# Altium PCB Arduino幻彩灯带.PcbDoc
Units mm, origin at the board's own origin, x right, y up, seen from the top; angles counter-clockwise.
Board outline 68.83 x 53.59 mm, 2 copper layers (Top Layer, Bottom Layer); 35 components, 33 nets, 139 pads, 99 vias.
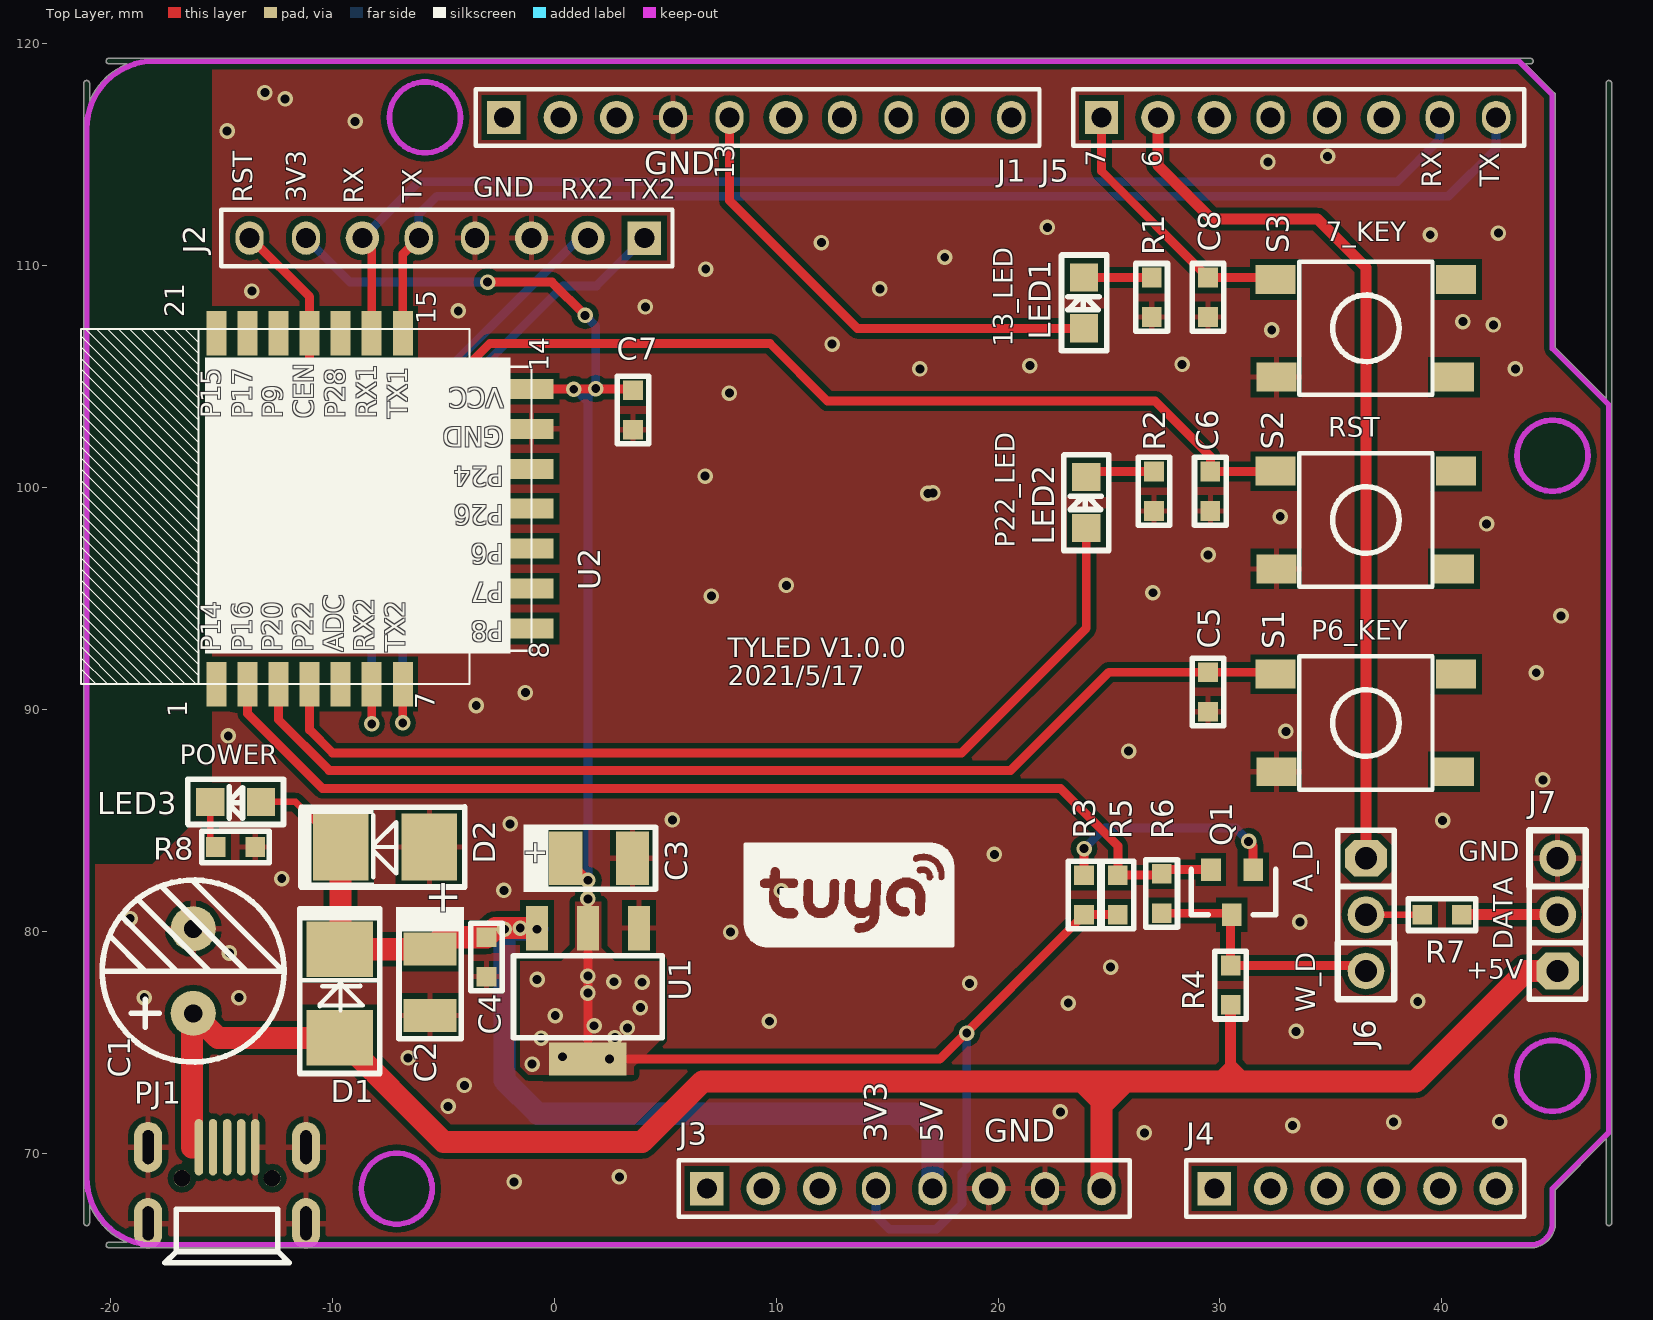
[diagram p0: Top Layer view]
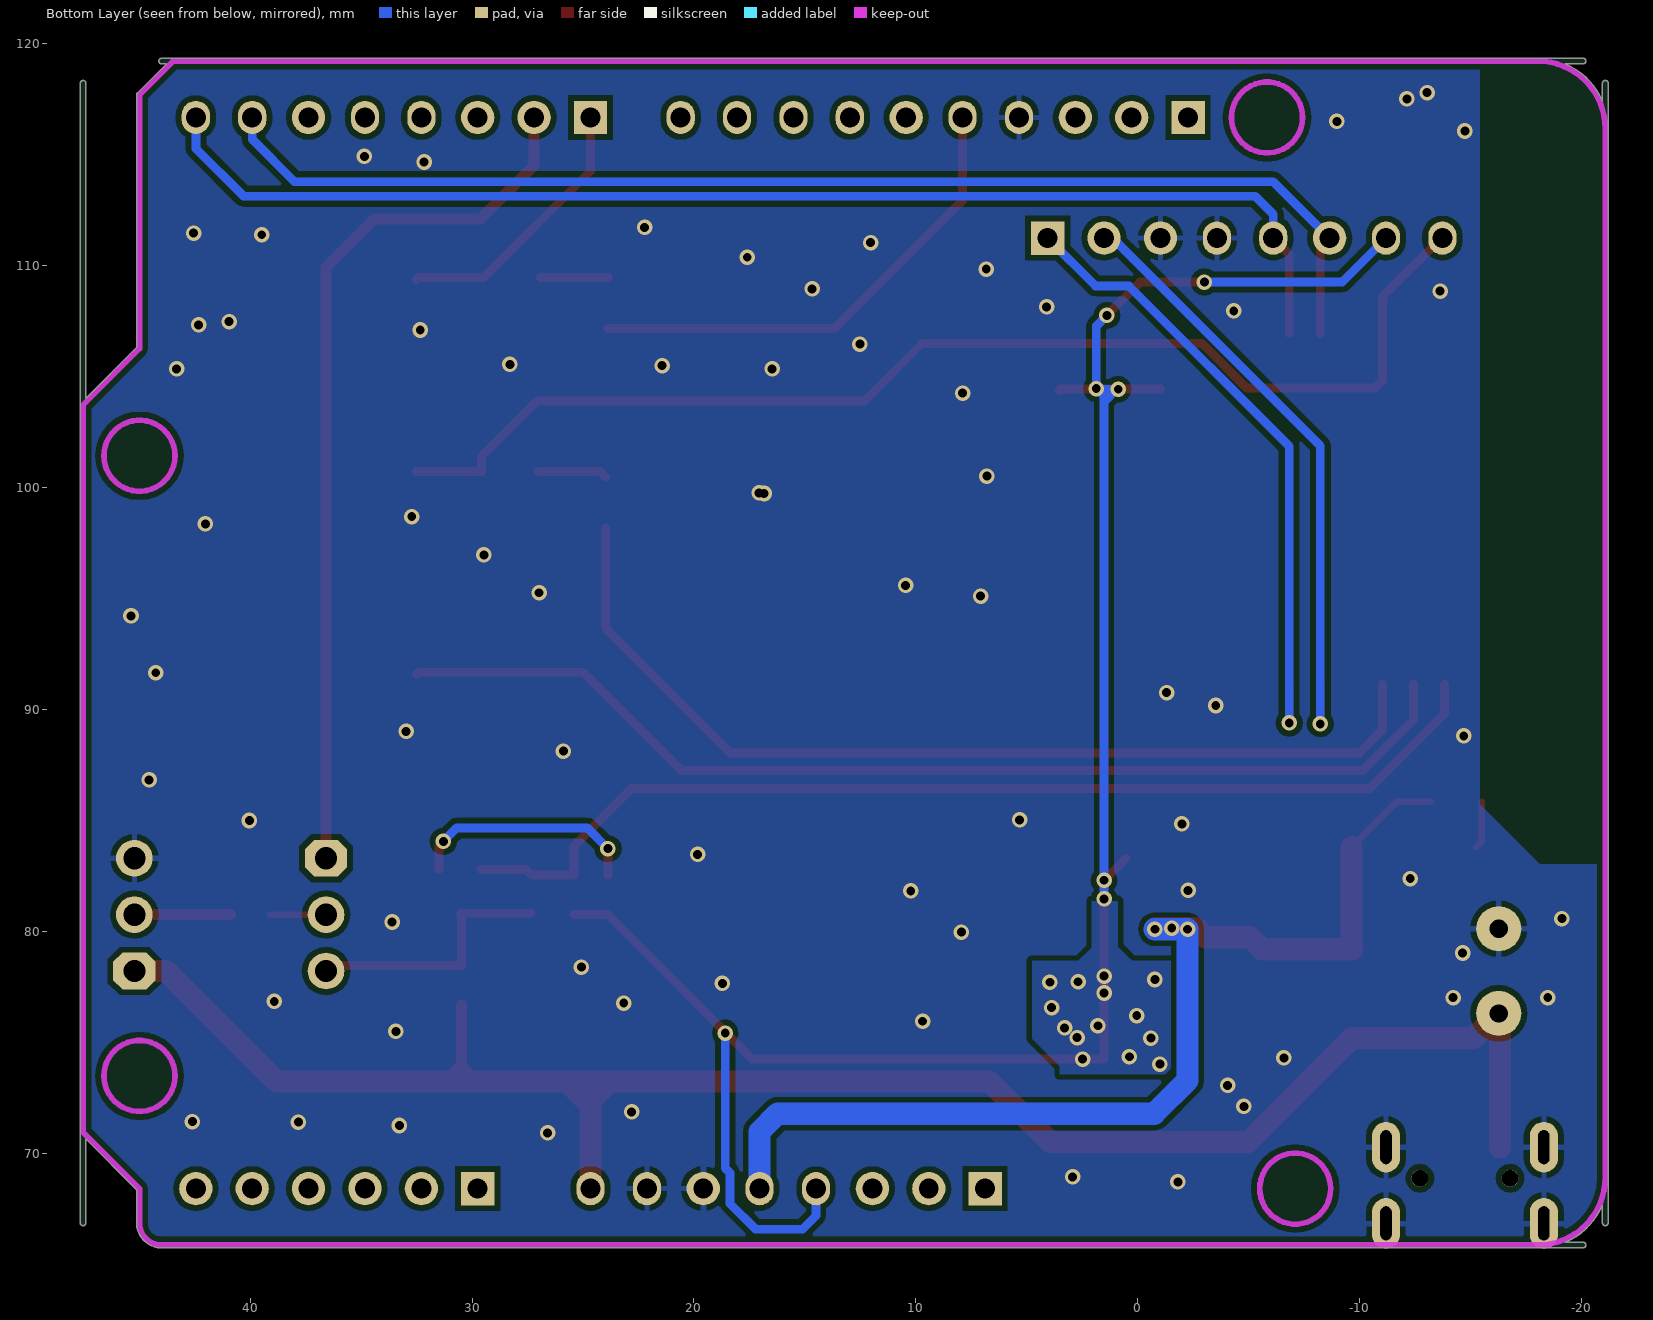
[diagram p1: Bottom Layer view, seen from below]

## Layer stack, top to bottom
Top Layer: signal copper 0.0356
Dielectric: dielectric 0.32, FR-4, Dk 4.8
Bottom Layer: signal copper 0.0356

## Board outline
-21.184,66.888 ccw(c-21.057,66.888) -20.929,66.888 -20.929,67.689 ccw(c-18.009,68.936) -19.255,66.015 -20.057,66.015 ccw(c-20.057,65.888) -20.057,65.76 43.983,65.76 ccw(c43.983,66.888) 45.111,66.888 ccw(c44.983,66.888) 45.111,66.888 45.111,68.375 47.396,70.66 47.396,66.888 ccw(c47.523,66.888) 47.651,66.888 47.651,118.228 ccw(c47.523,118.228) 47.396,118.228 47.396,104.041 45.111,106.326 45.111,117.704 ccw(c44.983,117.704) 45.073,117.794 43.767,119.1 43.983,119.1 ccw(c43.983,119.228) 44.111,119.228 ccw(c43.983,119.228) 43.983,119.355 -20.057,119.355 ccw(c-20.057,119.228) -20.057,119.1 -19.255,119.1 ccw(c-18.009,116.18) -20.929,117.426 -20.929,118.228 ccw(c-21.057,118.228) -21.184,118.228

## Design rules (kind name [scope] priority, off if disabled: settings)
Clearance Clearance_1 [All] p1: gap=0.254
Clearance [InNet('GND') vs InNetClass('All Nets')] p2: gap=0.254
HoleSize [All] p1: absolutevalues=TRUE maxlimit=3 minlimit=0.025 maxpercent=80.000 minpercent=20.000
HoleToHoleClearance [All] p1: gap=0 allowstackedmicrovias=TRUE
MinimumSolderMaskSliver [All] p1: minsoldermaskwidth=0
PolygonConnect PolygonConnect_5 [InNet('+3.3V') vs IsPad] p1: connectstyle=Direct reliefconductorwidth=0.254 reliefentries=4 polygonreliefangle="90 Angle" airgapwidth=0.254
PolygonConnect PolygonConnect_4 [InNet('+3.3V') vs IsVia] p2: connectstyle=Direct reliefconductorwidth=0.254 reliefentries=4 polygonreliefangle="90 Angle" airgapwidth=0.254
PolygonConnect PolygonConnect_3 [InNet('+5V') vs IsVia] p3: connectstyle=Direct reliefconductorwidth=0.254 reliefentries=4 polygonreliefangle="90 Angle" airgapwidth=0.254
PolygonConnect PolygonConnect_2 [InNet('+5V') vs IsPad] p4: connectstyle=Direct reliefconductorwidth=0.254 reliefentries=4 polygonreliefangle="90 Angle" airgapwidth=0.254
PolygonConnect PolygonConnect_1 [InNet('GND') vs IsVia] p5: connectstyle=Direct reliefconductorwidth=0.254 reliefentries=4 polygonreliefangle="90 Angle" airgapwidth=0.254
PolygonConnect [All] p6: connectstyle=Relief reliefconductorwidth=0.254 reliefentries=4 polygonreliefangle="90 Angle" airgapwidth=0.254
RoutingVias [All] p1: holewidth=0.2 width=1.27 viastyle="Through Hole" minholewidth=0.2 minwidth=0.2 maxholewidth=1.2 maxwidth=1.27
SilkToSilkClearance [All] p1: silktosilkclearance=0
SilkToSolderMaskClearance SilkscreenOverComponentPads [IsPad] p1: minsilkscreentomaskgap=0 clearancetoexposedcopper=TRUE
SolderMaskExpansion [All] p1: expansion=0.102
Width [All] p1: maxlimit=6 minlimit=0.254 preferedwidth=0.254
23 further rules are at their usual default settings.

## Components (designator, comment, footprint, x,y, rotation, side; value= is the part's Value field where it differs from the comment)
C1 "220uF±20%/16V" CD0.15 -16.256,78.232 r90 top
C2 "22uF±20%/16V" 钽电容B3528 -5.588,77.724 r270 top
C3 "22uF±20%/16V" 钽电容B3528 2.032,83.312 r0 top
C4 "0.1uF±20%/50V" C0603 -3.048,79.756 r270 top
C5 "0.1uF±20%/16V" C0603 29.464,89.916 r90 top
C6 "0.1uF±20%/16V" C0603 29.566,100.736 r270 top
C7 "0.1uF±20%/16V" C0603 3.556,102.616 r90 top
C8 "0.1uF±20%/16V" C0603 29.464,107.696 r90 top
D1 "SS210" SMA(DO-214AC) -9.652,77.216 r90 top
D2 "SMBJ05CA" SMB(DO-214AA) -7.62,83.82 r180 top
J1 "CON10" HDR1X10Z -2.261,116.688 r0 top
J2 "CON8" HDR1X8Z 4.064,111.252 r180 top
J3 "CON8" HDR1X8Z 6.883,68.428 r0 top
J4 "CON6" HDR1X6Z 29.743,68.428 r0 top
J5 "CON8" HDR1X8Z 24.663,116.688 r0 top
J6 "KF301-3P" "SIP3 - 2.54" 36.576,83.312 r270 top
J7 "KF301-3P" "SIP3 - 2.54" 45.212,78.232 r90 top
LED1 "LED" LED0805_1 23.876,107.188 r90 top
LED2 "LED" LED0805_1 23.978,98.196 r90 top
LED3 "LED" LED0805_1 -13.208,85.852 r180 top
PJ1 "MCR_USB" MICRO_USB-NEW-16.12.12 -14.732,68.58 r180 top
Q1 "S8050" SOT-23-NPN 31.496,82.804 r180 top
R1 "1K±5%" R0603 26.924,107.696 r90 top
R2 "1K±5%" R0603 27.026,100.736 r270 top
R3 "2K±5%" R0603 23.876,80.772 r90 top
R4 "2K±5%" R0603 30.48,76.708 r90 top
R5 "2K±5%" R0603 25.4,80.772 r90 top
R6 "NC/0R" R0603 27.374,82.614 r270 top
R7 "1R±5%" R0603 39.116,80.772 r0 top
R8 "1R±5%" R0603 -15.24,83.82 r0 top
S1 "KEY_SW2" KEY4-SMD 36.576,89.408 r0 top
S2 "KEY_SW2" KEY4-SMD 36.576,98.552 r0 top
S3 "KEY_SW2" KEY4-SMD 36.576,107.188 r0 top
U1 "GM1117-3.3ST3T" SOT-223 1.524,77.216 r180 top
U2 "WIFI_BLE_CBU" WIFI_BLE_CBU -1.016,99.06 r90 top

## Footprints (in the part's own frame and the unit in brackets; to place one, negate y for a bottom-side part, rotate by r counter-clockwise, add the part's x,y. Pads: shape width x height; smd on the part's side, far side on the other; paste and mask are expansions set on the pad)
C0603 [mil]
  rect 35x35 smd: 1(0,0) 2(70,0)
  silkscreen extent -25,-28 95,28, body extent 4,-16 66,15, height 12
CD0.15 [mil]
  round 80 hole 32: 1(-75,0) 2(75,0)
  silkscreen extent -161,-161 161,161, body extent -156,-150 158,165, height 630
HDR1X6Z [mm] "Connector; Header; 5 Position"
  rect 1.5x1.5 hole 0.9: 1(0,0)
  round 1.5 hole 0.9: 2(2.54,0) 3(5.08,0) 4(7.62,0) 5(10.16,0) 6(12.7,0)
  silkscreen extent -1.27,-1.27 13.97,1.27, body extent -1.27,-1.25 13.97,1.25, height 8.65
HDR1X8Z [mm] "Connector; Header; 8 Position"
  rect 1.5x1.5 hole 0.9: 1(0,0)
  round 1.5 hole 0.9: 2(2.54,0) 3(5.08,0) 6(12.7,0)
  oval 1.27x1.5 hole 0.9: 4(7.62,0) 5(10.16,0) 7(15.24,0) 8(17.78,0)
  silkscreen extent -1.27,-1.27 19.05,1.27, body extent -1.27,-1.25 19.05,1.25, height 8.65
HDR1X10Z [mm] "Connector; Header; 10 Position"
  rect 1.5x1.5 hole 0.9: 1(0,0)
  round 1.5 hole 0.9: 2(2.54,0) 3(5.08,0) 6(12.7,0)
  oval 1.27x1.5 hole 0.9: 4(7.62,0) 5(10.16,0) 7(15.24,0) 8(17.78,0) 9(20.32,0) 10(22.86,0)
  silkscreen extent -1.27,-1.27 24.13,1.27, body extent -1.27,-1.25 24.13,1.25, height 8.65
KEY4-SMD [mm]
  rect 1.8x1.3 smd: 1(-4.035,-2.2) 2(-4.065,2.2) 3(4.065,2.2) 4(3.965,-2.2)
  silkscreen extent -3,-3 3,3
LED0805_1 [mil]
  rect 50x50 smd: 1(0,0) 2(90,0)
  silkscreen extent -40,-40 130,40, body extent 6,-25 84,24, height 30
MICRO_USB-NEW-16.12.12 [mil]
  oval 15x100 smd: 1(-50,-67.5) 2(-25,-67.5) 3(0,-67.5) 4(25,-67.5) 5(50,-67.5)
  oval 50x90 hole 20 slot 60 at 90 deg: 6(-140,-67.5) 7(-140,67.5) 8(140,67.5) 9(140,-67.5)
  round 30 hole 30 unplated: ""(-80,-12.5) ""(80,-12.5)
  silkscreen extent -110,42 110,138, body extent -145,-79 146,158, height 93
R0603 [mil]
  rect 35x35 smd: 1(0,0) 2(70,0)
  silkscreen extent -25,-28 95,28, body extent 2,-16 65,16, height 18
"SIP3 - 2.54" [mil]
  oct 65x75 hole 39.37: 1(0,0)
  round 65 hole 39.37: 2(100,0) 3(200,0)
  silkscreen extent -50,-50 250,50
SMA(DO-214AC) [mm]
  rect 2.5x3 smd: 1(-2,0) 2(2,0)
  silkscreen extent -3.6,-1.84 3.94,1.83, body extent -2.21,-1.38 2.46,1.27, height 2.35
SMB(DO-214AA) [mm]
  rect 2.5x3 smd: 1(-2,0) 2(2,0)
  silkscreen extent -3.6,-1.8 3.91,1.82, body extent -2.28,-1.33 2.39,1.32, height 2.35
SOT-23-NPN [mil]
  rect 35x40 smd: 1(75,0) 2(0,0) 3(38,80)
  silkscreen extent -40,0 110,80, body extent -17,-17 97,80, height 39
SOT-223 [mm]
  rect 1x2 smd: 1(-2.3,-2.95) 2(0,-2.95) 3(2.3,-2.95)
  rect 3.5x1.5 smd: 2(0,2.95)
  silkscreen extent -3.35,-1.71 3.35,1.99, body extent -3.29,-3.55 3.21,3.41, height 1.65
WIFI_BLE_CBU [mm]
  rect 2x0.9 smd: 1(-7.9,14.2) 2(-7.9,12.8) 3(-7.9,11.4) 4(-7.9,10) 5(-7.9,8.6) 6(-7.9,7.2) 7(-7.9,5.8) 15(7.9,5.8) 16(7.9,7.2) 17(7.9,8.6) 18(7.9,10) 19(7.9,11.4) 20(7.9,12.8) 21(7.9,14.2)
  rect 0.9x2 smd: 8(-5.4,0) 9(-3.6,0) 10(-1.8,0) 11(0,0) 12(1.8,0) 13(3.6,0) 14(5.4,0)
  silkscreen extent -7.9,0 8.14,20.33
钽电容B3528 [mm]
  rect 1.5x2.4 smd: 1(-1.5,0) 2(1.5,0)
  silkscreen extent -3.4,-1.52 2.54,1.52

## Part data
C1 C2 C3: library part "CAPACITOR POL", "Capacitor"
C4 C5 C6 C7 C8: library part CAP, "Capacitor"
D1: library part Diode1, "Diode"
D2: library part "D Schottky", "Schottky Diode"
J1 J2 J3 J4 J5: "Connector"
J6 J7: library part CON3, "Connector"
Q1: library part NPN, "NPN Transistor"
R1 R2 R3 R4 R5 R6 R7 R8: library part RES5
U1: library part GM1117
U2: "Module"

## Via types
v1: diameter 0.7, hole 0.4, Top Layer to Bottom Layer, tented both sides, 99 vias

## Nets (pads, with @x,y where several pads share a name; then routed paths per layer and width w, separated by ;. In a path a pad name is that pad's centre, name@x,y a point inside that pad or via, vN(x,y) a via of type N, cw(c..) or ccw(c..) an arc to the next point about the centre after c; other vN are vias at no path point)
+3.3V: C3.1 C7.2 J2.7 J3.4 R3.1 R5.1 U1.2 U2.14 | length 96.7
  Top Layer w0.4: v1(-2.997,109.271) -0.102,109.271 v1(1.397,107.772) ; U2.14 3.49,104.46 C7.2 ; C3.1 v1(1.524,82.32) 1.524,80.166 1.524,74.266 17.37,74.266 R3.1 R5.1
  Bottom Layer w0.4: J2.7 -9.195,109.271 v1(-2.997,109.271) ; v1(1.397,107.772) 1.88,107.29 v1@1.88,104.521 ; v1(1.524,81.483) 1.524,104.115 v1(1.88,104.47) 1.854,104.445 v1(0.889,104.445) 0.965,104.445 1.524,103.886 ; J3.4 14.503,67.208 15.113,66.599 17.221,66.599 18.379,67.757 18.379,69.14 18.593,69.353 v1(18.593,75.438)
  other v1: -0.991,74.041 2.489,74.266 0.381,74.371 -0.584,75.209 2.743,75.235 3.302,75.667 1.803,75.768 0.051,76.225 3.886,76.581 1.524,77.241 3.962,77.724 2.692,77.749 -0.762,77.851 1.524,78.003
+5V: C1.1 D1.1 J3.8 J7.1 PJ1.5 R4.1 | length 93.6
  Top Layer w0.3: C1.1 -16.002,76.073 PJ1.5
  Top Layer w0.5: 29.769,73.254 30.48,73.965 30.48,74.346 ; 30.328,73.254 30.48,73.406 30.48,74.041 ; R4.1 30.48,74.346 ; 31.242,73.254 30.48,74.016 30.48,74.041 ; 30.48,74.041 30.48,74.346
  Top Layer w1: -16.312,70.294 -16.312,76.271 C1.1 -15.145,75.216 D1.1 -4.972,70.536 3.962,70.536 6.68,73.254 23.012,73.254 ; J3.8 24.663,72.974 24.943,73.254 ; J7.1 43.79,78.232 38.811,73.254 25.73,73.254 ; 23.012,73.254 25.73,73.254 ; 23.012,73.254 23.8,73.254 24.663,72.39 24.867,72.39 25.73,73.254
+5VF: C2.1 C4.1 D1.2 D2.2 J3.5 LED3.1 U1.3 | length 49.4
  Top Layer w0.3: LED3.1 -11.652,85.852 D2.2
  Top Layer w1: D2.2 -9.62,79.248 D1.2 -5.596,79.216 C2.1 -5.056,79.756 C4.1 -2.638,80.166 U1.3
  Bottom Layer w1: v1(-0.762,80.112) v1(-2.235,80.112) -2.235,73.304 -0.737,71.806 16.231,71.806 17.043,70.993 J3.5
  other v1: -1.524,80.162
ADC: U2.5
GND: C1.2 C2.2 C3.2 C4.2 C5.1 C6.2 C7.1 C8.1 D2.1 J1.4 J2.3 J2.4 J3.6 J3.7 J7.3 PJ1.1 PJ1.6 PJ1.7 PJ1.8 PJ1.9 R1.1 R2.2 R8.2 S1.1 S2.1 S3.1 U1.1 U2.13
  other v1: -1.803,68.732 2.946,68.961 26.594,70.942 33.274,71.272 37.821,71.425 42.596,71.45 22.809,71.882 -4.775,72.136 -4.039,73.076 -6.579,74.32 33.426,75.514 9.703,75.971 23.165,76.784 38.913,76.86 -18.466,77.038 -14.199,77.038 18.72,77.673 25.07,78.41 -14.63,79.045 7.95,79.985 33.604,80.442 -19.101,80.594 10.236,81.839 -2.261,81.864 -12.268,82.398 19.837,83.49 -1.981,84.861 40.03,85.014 5.334,85.039 44.552,86.843 25.883,88.138 -14.681,88.824 32.969,89.027 -3.505,90.195 -1.295,90.78 44.247,91.669 45.364,94.234 7.087,95.123 26.975,95.275 10.465,95.606 29.464,96.977 42.012,98.374 32.715,98.704 16.84,99.746 17.069,99.771 6.807,100.533 7.899,104.267 16.485,105.359 43.307,105.359 21.438,105.512 28.296,105.562 12.522,106.477 32.334,107.112 42.316,107.34 40.945,107.493 -4.318,107.975 4.115,108.153 -13.614,108.864 14.681,108.966 6.833,109.855 17.602,110.388 12.04,111.049 39.472,111.404 42.545,111.481 22.225,111.735 32.156,114.681 34.849,114.935 -14.732,116.078 -8.966,116.51 -12.116,117.526 -13.03,117.805
NetC8_2: C8.2 J5.1 S3.2 | length 12.3
  Top Layer w0.4: J5.1 24.663,114.275 C8.2 32.425,109.474 S3.2
NetJ1_5: J1.5 LED1.1 | length 22.1
  Top Layer w0.4: J1.5 7.899,112.954 13.665,107.188 LED1.1
NetJ7_2: J7.2 R7.2 | length 4.3
  Top Layer w0.5: R7.2 J7.2
NetLED1_2: LED1.2 R1.2 | length 3
  Top Layer w0.4: LED1.2 R1.2
NetLED2_2: LED2.2 R2.1 | length 3.2
  Top Layer w0.4: LED2.2 24.232,100.736 R2.1
NetLED3_2: LED3.2 R8.1 | length 2.1
  Top Layer w0.3: LED3.2 -15.494,84.074 R8.1
NetQ1_2: Q1.2 R3.2 | length 10.6
  Top Layer w0.4: R3.2 v1(23.876,83.744) ; v1(31.293,84.074) 31.496,83.871 Q1.2
  Bottom Layer w0.4: v1(23.876,83.744) 24.816,84.684 30.683,84.684 v1(31.293,84.074)
OUT_DATA: Q1.1 R5.2 R6.1 U2.2 | length 48.7
  Top Layer w0.4: U2.2 -13.816,89.838 -10.439,86.462 22.809,86.462 23.812,85.458 25.4,83.871 R5.2 R6.1@27.309,82.55 ; R6.1 R6.1@27.309,82.55 ; Q1.1 27.563,82.804 R6.1@27.309,82.55
OUT_RGB: J6.2 R7.1 | length 2.5
  Top Layer w0.3: J6.2 R7.1
OUT_RGB_ARD: J5.2 J6.1 | length 40.1
  Top Layer w0.5: J5.2 27.203,114.529 29.616,112.116 34.392,112.116 36.576,109.931 J6.1
OUT_RGB_CBU: J6.3 Q1.3 R4.2 R6.2 | length 11.7
  Top Layer w0.4: R6.2 30.466,80.836 Q1.3 30.48,80.721 R4.2 36.322,78.486 J6.3
P6: U2.10
P6_KEY1: C5.2 S1.2 U2.3 | length 49.3
  Top Layer w0.4: U2.3 -12.416,89.556 -10.135,87.274 20.574,87.274 24.994,91.694 C5.2 32.425,91.694 S1.2
P7: U2.9
P8: U2.8
P9: U2.19
P14: U2.1
P15: U2.21
P17: U2.20
P22: LED2.1 U2.4 | length 44.3
  Top Layer w0.4: U2.4 -11.016,89.096 -9.982,88.062 18.364,88.062 23.978,93.675 LED2.1
P24: U2.12
P26: U2.11
P28: U2.17
RST: C6.1 J2.8 S2.2 U2.18 | length 54.9
  Top Layer w0.4: J2.8 -13.665,111.252 -11.016,108.603 U2.18 -11.016,104.818 -10.693,104.496 -4.902,104.496 -2.896,106.502 9.728,106.502 12.319,103.911 27.076,103.911 29.566,101.422 C6.1 32.495,100.736 S2.2
RX2: J2.2 U2.6 | length 27.9
  Top Layer w0.4: v1(-8.216,89.369) U2.6
  Bottom Layer w0.4: v1(-8.216,89.369) -8.216,101.893 1.143,111.252 J2.2
TX2: J2.1 U2.7 | length 29
  Top Layer w0.4: v1(-6.816,89.408) U2.7
  Bottom Layer w0.4: v1(-6.816,89.408) -6.816,101.871 0.406,109.093 1.905,109.093 J2.1
WRX: J2.6 J5.7 U2.16 | length 55.8
  Top Layer w0.4: J2.6 -8.216,110.832 U2.16
  Bottom Layer w0.4: J2.6 -6.096,113.792 37.998,113.792 39.903,115.697 J5.7
WTX: J2.5 J5.8 U2.15 | length 56.8
  Top Layer w0.4: U2.15 -6.816,110.532 J2.5
  Bottom Layer w0.4: J2.5 -6.096,112.325 -5.283,113.138 40.291,113.138 42.443,115.291 J5.8
pads on no net: J1.1 J1.2 J1.3 J1.6 J1.7 J1.8 J1.9 J1.10 J3.1 J3.2 J3.3 J4.1 J4.2 J4.3 J4.4 J4.5 J4.6 J5.3 J5.4 J5.5 J5.6 PJ1. PJ1.2 PJ1.3 PJ1.4 S1.3 S1.4 S2.3 S2.4 S3.3 S3.4

## Polygon pours and split planes (outlines as drawn)
GND on Top Layer "Top Layer-No Net" (solid, remove dead copper, pour order 5): -21.057,65.888 -21.057,83.033 -18.085,83.033 -18.085,83.058 -16.053,85.09 -15.392,85.75 -15.392,119.228 46.523,119.228 47.523,118.228 47.549,118.202 47.549,65.811
+3.3V on Top Layer "Top Layer-No Net" (solid, remove dead copper, pour order 7): 0.965,81.356 0.965,79.299 0.533,78.867 0.33,78.664 -1.524,78.664 -1.524,73.914 -1.168,73.558 3.581,73.558 3.581,73.914 4.597,74.93 4.826,75.159 4.826,78.664 2.743,78.664 2.235,79.172 2.134,79.273 2.134,81.356
GND on Bottom Layer "Top Layer-No Net" (solid, remove dead copper, pour order 6): -21.057,65.888 -21.057,83.033 -18.085,83.033 -18.085,83.058 -16.053,85.09 -15.392,85.75 -15.392,119.228 46.523,119.228 47.523,118.228 47.549,118.202 47.549,65.811
+3.3V on Bottom Layer "Top Layer-No Net" (solid, remove dead copper, pour order 8): 0.902,81.382 0.902,79.324 0.47,78.892 0.267,78.689 -1.587,78.689 -1.587,73.939 -1.232,73.584 3.518,73.584 3.518,73.939 4.534,74.955 4.763,75.184 4.763,78.689 2.68,78.689 2.172,79.197 2.07,79.299 2.07,81.382

## Keep-outs
Keep-Out Layer:
  circle w0.254: c44.983,73.508 r1.6
  circle w0.254: c-5.817,116.688 r1.6
  circle w0.254: c-7.087,68.428 r1.6
  circle w0.254: c44.983,101.448 r1.6
  lines w0.254: -18.542,65.888 43.983,65.888 ccw(c43.983,66.888) 44.983,66.888 44.983,68.428 47.523,70.968 47.523,103.734 44.983,106.274 44.983,117.704 43.459,119.228 -18.009,119.228 ccw(c-18.009,116.18) -21.057,116.18 -21.057,68.936 ccw(c-18.009,68.936) -18.009,65.888

## Silkscreen, mask and mechanical layers (free items; w line width, h text height)
Top Overlay:
  drawing of 754 lines, arcs and shapes, not listed
  text "7" at 25.121,114.478 h1.5 r90
  text "6" at 27.661,114.452 h1.5 r90
  text "GND" at 4.064,114.122 h1.02
  text "13" at 8.407,113.919 h1.5 r90
  text "TX" at 42.875,113.563 h1.5 r90
  text "RX" at 40.259,113.513 h1.5 r90
  text "3V3" at -10.897,112.878 h1.5 r90
  text "RST" at -13.31,112.852 h1.5 r90
  text "TX" at -5.664,112.852 h1.5 r90
  text "GND" at -3.632,112.827 h1.5
  text "RX" at -8.306,112.801 h1.5 r90
  text "RX2" at 0.305,112.725 h1.5
  text "TX2" at 3.2,112.725 h1.5
  text "7_KEY" at 34.773,110.82 h1.5
  text "13_LED" at 20.955,106.35 h1.5 r90
  text "RST" at 34.874,102.006 h1.5
  text "P22_LED" at 21.057,97.307 h1.5 r90
  text "P6_KEY" at 34.112,92.862 h1.5
  text "TYLED V1.0.0" at 7.823,92.075 h1.5
  text "2021/5/17" at 7.823,90.805 h1.5
  text "POWER" at -16.866,87.249 h1.5
  text "GND" at 40.767,82.906 h1.5
  text "A_D" at 34.468,81.788 h1.5 r90
  text "DATA" at 43.485,79.197 h1.5 r90
  text "+5V" at 41.097,77.597 h1.5
  text "W_D" at 34.595,76.378 h1.5 r90
  text "GND" at 19.38,70.536 h1.02
  text "3V3" at 14.986,70.51 h1.02 r90
  text "5V" at 17.501,70.51 h1.02 r90

## Dimensions
47.523,103.734 to -21.057,116.18 on Top Overlay

## Text inside footprints (layer, text, board x,y; h text height)
C2: Top Overlay "+" at -5.842,80.899 h1.5
C3: Top Overlay "+" at -0.406,82.982 h1 r90
U2: Top Overlay "P15" at -14.757,103.126 h1.5 r90; Top Overlay "P17" at -13.339,103.126 h1.5 r90; Top Overlay "P9" at -11.952,103.126 h1.5 r90; Top Overlay "CEN" at -10.549,103.126 h1.5 r90; Top Overlay "P28" at -9.146,103.126 h1.5 r90; Top Overlay "RX1" at -7.727,103.126 h1.5 r90; Top Overlay "TX1" at -6.325,103.126 h1.5 r90; Top Overlay "GND" at -2.261,103.022 h1.5 r180; Top Overlay "VCC" at -2.262,104.775 h1.5 r180; Top Overlay "TX2" at -6.426,92.608 h1.5 r90; Top Overlay "RX2" at -7.825,92.608 h1.5 r90; Top Overlay "ADC" at -9.207,92.608 h1.5 r90; Top Overlay "P22" at -10.589,92.608 h1.5 r90; Top Overlay "P20" at -11.971,92.608 h1.5 r90; Top Overlay "P16" at -13.338,92.608 h1.5 r90; Top Overlay "P14" at -14.736,92.608 h1.5 r90; Top Overlay "21" at -16.358,107.696 h1.5 r90; Top Overlay "1" at -16.236,89.66 h1.5 r90; Top Overlay "P24" at -2.261,101.254 h1.5 r180; Top Overlay "P26" at -2.261,99.501 h1.5 r180; Top Overlay "P6" at -2.261,97.753 h1.5 r180; Top Overlay "P7" at -2.261,96.012 h1.5 r180; Top Overlay "P8" at -2.261,94.259 h1.5 r180; Top Overlay "7" at -5.085,90.016 h1.5 r90; Top Overlay "8" at 0.051,92.304 h1.5 r90; Top Overlay "14" at 0.051,105.258 h1.5 r90; Top Overlay "15" at -5.029,107.366 h1.5 r90